# Altium PCB PCB1.PcbDoc
Units mil, origin at the board's own origin, x right, y up, seen from the top; angles counter-clockwise.
Board outline 3500 x 2000 mil, 2 copper layers (Top Layer, Bottom Layer), stack 61.756 mil thick; 37 components, 23 nets, 95 pads, 0 vias.
Unrouted connection lines stored in the file: 70.
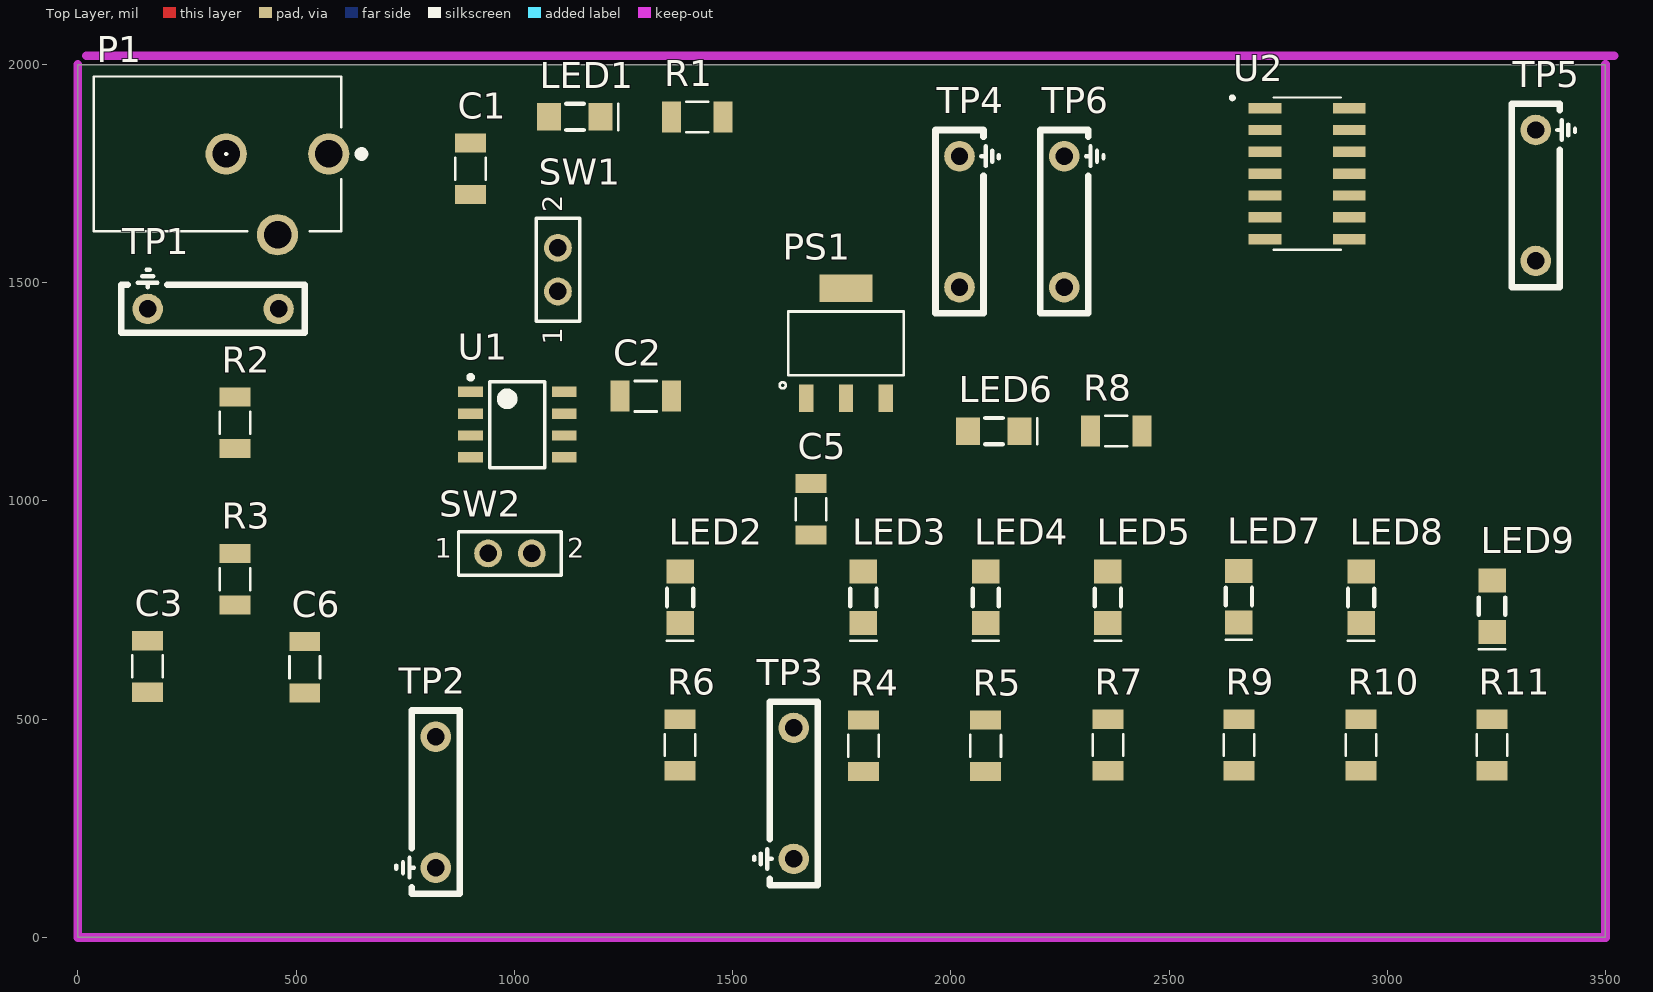
[diagram p0: Top Layer view]
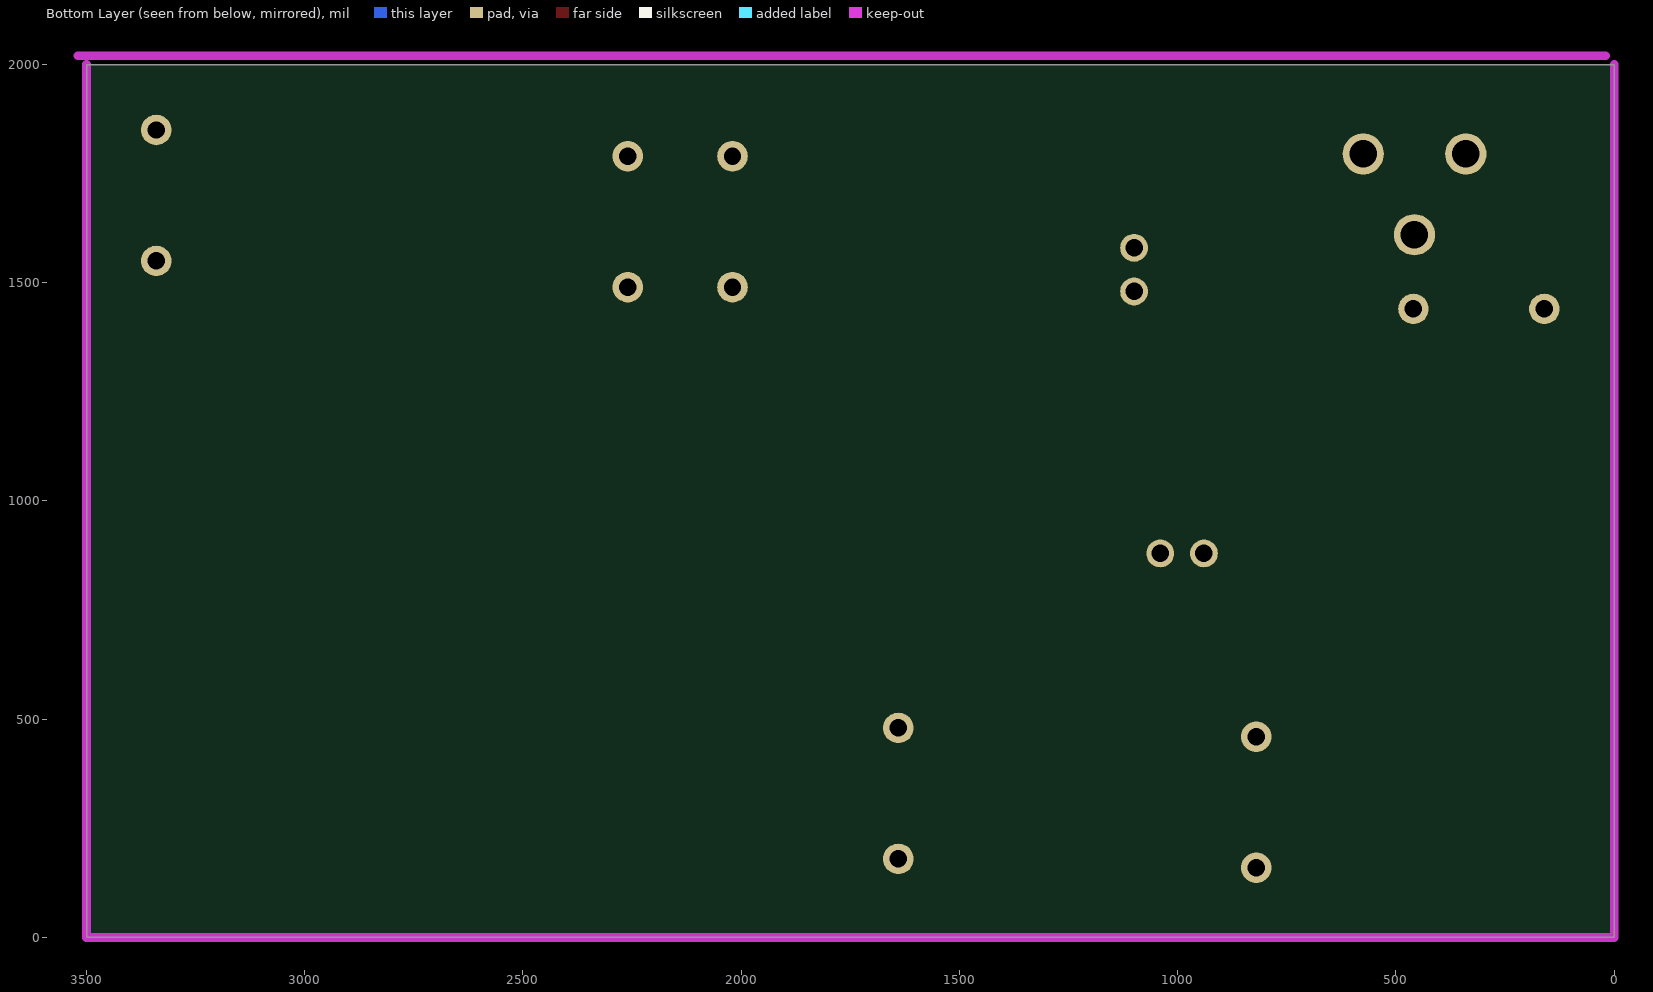
[diagram p1: Bottom Layer view, seen from below]

## Layer stack, top to bottom
Top Solder: solder mask 1, SM-001, Dk 4
Top Layer: signal copper 1.378
Dielectric 1: core 59, Core-043, Dk 4.3
Bottom Layer: signal copper 1.378
Bottom Solder: solder mask 1, SM-001, Dk 4

## Board outline
0,0 3500,0 3500,2000 0,2000

## Design rules (kind name [scope] priority, off if disabled: settings)
Clearance [All] p1: gap=10 ignorepadtopadclearanceinfootprint=FALSE except(0: Arc-Hole Track-Hole SMDPad-Hole THPad-Hole Via-Hole Fill-Hole Poly-Hole Region-Hole Text-Hole)
PlaneClearance [All] p1: clearance=10
PlaneConnect [All] p1: planeconnectstyle=Direct reliefexpansion=20 reliefentries=4 reliefconductorwidth=10 reliefairgap=10
PolygonConnect [All] p1: connectstyle=Direct reliefconductorwidth=10 reliefentries=4 polygonreliefangle="90 Angle" airgapwidth=10
RoomDefinition Sheet1 [InComponentClass('Sheet1')] p1: confinementstyle=ConfineIn formatcopy=TRUE lockcomponents=FALSE outline -570,2013 4940,2013 4940,2763 -570,2763
RoutingVias [All] p1: holewidth=13 width=25 viastyle="Through Hole" minholewidth=13 minwidth=25 maxholewidth=60 maxwidth=80
SolderMaskExpansion [All] p1: expansion=4 istentingtop=FALSE
UnRoutedNet [All] p1: checkbadconnections=TRUE
Width "Schematic Width Constraint_2" [InNet('LDO_3.3V')] p1: maxlimit=100 minlimit=10 preferedwidth=20 minimp=50.000000 maximp=50.000000 favimp=50.000000
Width "Schematic Width Constraint_1" [InNet('+5')] p2: maxlimit=100 minlimit=10 preferedwidth=20 minimp=50.000000 maximp=50.000000 favimp=50.000000
Width "Schematic Width Constraint" [InNet('555_5v')] p3: maxlimit=100 minlimit=10 preferedwidth=20 minimp=50.000000 maximp=50.000000 favimp=50.000000
Width [All] p4: maxlimit=100 minlimit=6 preferedwidth=6 minimp=50.000000 maximp=50.000000 favimp=50.000000
27 further rules are at their usual default settings.

## Components (designator, comment, footprint, x,y, rotation, side; value= is the part's Value field where it differs from the comment)
C1 "22pF" 1206_Passive 900,1820 r270 top
C2 "22pF" 1206_Passive 1242,1240 r0 top
C3 "50nF" 1206_Passive 160,562 r90 top
C5 "22uF" 1206_Passive 1680,922 r90 top
C6 "50nF" 1206_Passive 520,560 r90 top
LED1 "LTST-C150CKT" LED 1198,1880 r270 top value=Red
LED2 "LTST-C150CKT" LED 1380,720 r180 top value=Red
LED3 "LTST-C150CKT" LED 1800,720 r180 top value=Red
LED4 "LTST-C150CKT" LED 2080,720 r180 top value=Red
LED5 "LTST-C150CKT" LED 2360,720 r180 top value=Red
LED6 "LTST-C150CKT" LED 2158,1160 r270 top value=Red
LED7 "LTST-C150CKT" LED 2660,722 r180 top value=Red
LED8 "LTST-C150CKT" LED 2940,720 r180 top value=Red
LED9 "LTST-C150CKT" LED 3240,700 r180 top value=Red
P1 "Power Jack" Power_Jack 575,1795 r180 top value="CONN PWR JACK 2X5.5MM SOLDER"
PS1 "AZ1117CH-3.3TRG1" LDO 1760,1360 r180 top value="IC REG LINEAR 3.3V 800MA SOT223"
R1 "1k" 1206_Passive 1478,1880 r180 top value="1K Ohm"
R2 "10k" 1206_Passive 360,1120 r90 top value=10KOhm
R3 "10k" 1206_Passive 360,762 r90 top value=10KOhm
R4 "1k" 1206_Passive 1800,380 r90 top value="1K Ohm"
R5 "300" 1206_Passive 2080,380 r90 top value=300Ohm
R6 "1M" 1206_Passive 1380,382 r90 top value="10k Ohm"
R7 "1M" 1206_Passive 2360,382 r90 top value=50
R8 "1k" 1206_Passive 2438,1160 r180 top value="1K Ohm"
R9 "50" 1206_Passive 2660,382 r90 top value=50Ohm
R10 "50" 1206_Passive 2940,382 r90 top value=50Ohm
R11 "50" 1206_Passive 3240,382 r90 top value=50Ohm
SW1 "SW_2Pin_100mil_Switch" 2Pin-Header-Conn 1100,1480 r90 top
SW2 "SW_LED_Off/On" 2Pin-Header-Conn 940,880 r0 top
TP1 "TP_5V" TP10x_Probe 310,1440 r180 top
TP2 "TP_555_Output" TP10x_Probe 820,310 r270 top
TP3 "TP_LED_current" TP10x_Probe 1640,330 r270 top
TP4 "TP_Quiet_Low" TP10x_Probe 2020,1640 r90 top
TP5 "TP_Quiet_High" TP10x_Probe 3340,1700 r90 top
TP6 "TP_Trigger" TP10x_Probe 2260,1640 r90 top
U1 "U_555_Fast" TS555IDTTR 900,1250 r0 top
U2 "Hex Inverter" HEX_74LVT14D 2816.65,1750 r0 top

## Footprints (in the part's own frame and the unit in brackets; to place one, negate y for a bottom-side part, rotate by r counter-clockwise, add the part's x,y. Pads: shape width x height; smd on the part's side, far side on the other; paste and mask are expansions set on the pad)
2Pin-Header-Conn [mm]
  round 1.62 hole 1.02: 1(0,0) 2(2.54,0)
  silkscreen extent -1.72,-1.27 4.26,1.26
1206_Passive [mil]
  rect 44x71 smd: 1(0,0) 2(118,0)
  silkscreen extent 34,-35 84,35
HEX_74LVT14D [mm]
  rect 1.9x0.6 smd: 1(-2.455,3.81) 2(-2.455,2.54) 3(-2.455,1.27) 4(-2.455,0) 5(-2.455,-1.27) 6(-2.455,-2.54) 7(-2.455,-3.81) 8(2.455,-3.81) 9(2.455,-2.54) 10(2.455,-1.27) 11(2.455,0) 12(2.455,1.27) 13(2.455,2.54) 14(2.455,3.81)
  silkscreen extent -4.45,-4.43 1.95,4.51
LDO [mil]
  rect 33x63 smd: 1(91,124.94) 2(0,124.94) 3(-91,124.94)
  rect 122x63 smd: 4(0,-127.06)
  silkscreen extent -132,-74 152,102
LED [mil]
  rect 63x55 smd: 1(0,0) 2(0,-118)
  silkscreen extent -30,-79 30,40
Power_Jack [mm]
  round 2.4 hole 1.6: 1(0,0) 2(5.969,0) 3(2.977,4.7)
  silkscreen extent -2.1,-4.5 13.68,4.5
TP10x_Probe [mil] "Small Probs footprint"
  round 70 hole 40: 1(-150,0) 2(150,0)
  silkscreen extent -210,-90 210,55
TS555IDTTR [mm] "IC OSC Single Timer 2.7MHz 8SOIC"
  rect 1.45x0.6 smd: 1(0,0) 2(0,-1.27) 3(0,-2.54) 4(0,-3.81) 5(5.45,-3.81) 6(5.45,-2.54) 7(5.45,-1.27) 8(5.45,0)
  silkscreen extent -0.12,-4.41 4.33,0.97

## Part data
C1 C2: library part C_22pF_1206, "22pF ±5% 16V Ceramic Capacitor C0G, NP0 1206 (3216 Metric)", Digikey Link=https://www.digikey.com/product-detail/en/885012008011/732-7867-1-ND/5454494/?itemSeq=304982362, Digikey Part=732-7867-1-ND
C3 C6: library part C_50nF_1206, "50nF ±5% 16V Ceramic Capacitor C0G, NP0 1206 (3216 Metric)", Digikey Link=https://www.digikey.com/product-detail/en/885012008011/732-7867-1-ND/5454494/?itemSeq=304982362, Digikey Part=732-7867-1-ND
C5: library part C_22uF_1206, "22µF ±20% 16V Ceramic Capacitor X5R 1206 (3216 Metric)", Digikey Link=https://www.digikey.com/product-detail/en/CL31A226MOCLNNC/1276-2728-1-ND/3890814/?itemSeq=304982363, Digikey Part=1276-2728-1-ND
LED1 LED2 LED3 LED4 LED5 LED6 LED7 LED8 LED9: library part LED_RED_1206, "Red 638nm LED Indication - Discrete 1.8V 1206 (3216 Metric)", Digikey Link=https://www.digikey.com/product-detail/en/LTST-C150CKT/160-1167-1-ND/269239/?itemSeq=304982368, Digikey Part=160-1167-1-ND
P1: library part "P_Power Jack", "Power Barrel Connector Jack 2.10mm ID (0.083\"), 5.50mm OD (0.217\") Through Hole, Right Angle", Digikey Link=https://www.digikey.com/product-detail/en/PJ-102A/CP-102A-ND/275425/?itemSeq=304982367, Digikey Part=CP-102A-ND
PS1: library part PS_LDO_3v3, "Linear Voltage Regulator IC Positive Fixed 1 Output 1A SOT-223", Digikey Link=https://www.digikey.com/product-detail/en/AZ1117CH-3.3TRG1/AZ1117CH-3.3TRG1DICT-ND/4505206/?itemSeq=304982370, Digikey Part=AZ1117CH-3.3TRG1DICT-ND
R1 R4 R8: library part R_1K_1206, "1 kOhms ±1% 0.5W, 1/2W Chip Resistor 1206 (3216 Metric) Anti-Sulfur, Moisture Resistant Thin Film", Digikey Link=https://www.digikey.com/product-detail/en/RNCP1206FTD1K00/RNCP1206FTD1K00CT-ND/2240675/?itemSeq=304982373, Digikey Part=RNCP1206FTD1K00CT-ND
R2 R3: library part R_10KOhm_1206, "10 kOhms ±5% 0.25W, 1/4W Chip Resistor 1206 (3216 Metric) Automotive AEC-Q200 Thick Film", Digikey Link=https://www.digikey.com/product-detail/en/RMCF1206JT300R/RMCF1206JT300RCT-ND/1942776/?itemSeq=304982374, Digikey Part=RMCF1206JT300RCT-ND
R5: library part R_300Ohm_1206, "300 Ohms ±5% 0.25W, 1/4W Chip Resistor 1206 (3216 Metric) Automotive AEC-Q200 Thick Film", Digikey Link=https://www.digikey.com/product-detail/en/RMCF1206JT300R/RMCF1206JT300RCT-ND/1942776/?itemSeq=304982374, Digikey Part=RMCF1206JT300RCT-ND
R6 R7: library part R_1M_1206, "1 MOhms ±5% 0.25W, 1/4W Chip Resistor 1206 (3216 Metric) Automotive AEC-Q200 Thick Film", Digikey Link=https://www.digikey.com/product-detail/en/RMCF1206JT1M00/RMCF1206JT1M00CT-ND/1942830/?itemSeq=304982358, Digikey Part="Number RMCF1206JT1M00CT-ND"
R9 R10 R11: library part R_50Ohm_1206, "50 Ohms ±5% 0.25W, 1/4W Chip Resistor 1206 (3216 Metric) Automotive AEC-Q200 Thick Film", Digikey Link=https://www.digikey.com/product-detail/en/RMCF1206JT300R/RMCF1206JT300RCT-ND/1942776/?itemSeq=304982374, Digikey Part=RMCF1206JT300RCT-ND
SW1: "2Pin Header"
SW2: library part SW_2Pin_100mil_Switch, "2Pin Header"
TP1 TP2 TP3 TP4 TP5 TP6: library part TP_10x_Probe, "Test Point 300 mil centers"
U1: "555 Type, Timer/Oscillator _Single_ IC 2.7MHz 8-SO", Package="SO-8 STMicroelectronics", Availability=Unavailable, DigiKey-Purchase-URL=https://snapeda.com/shop?store=DigiKey&id=1050007, MF=STMicroelectronics, MP=TS555IDTTR, Price=None, SnapEDA_Link=https://www.snapeda.com/parts/TS555IDTTR/STMicroelectronics/view-part/1050007/?ref=snap
U2: library part U_7414_LVTD_Hex, "Inverter IC 6 Channel Schmitt Trigger 14-SOIC", ComponentLink1Description="New link", Supplier 1=Digi-Key

## Nets (pads, with @x,y where several pads share a name; then routed paths per layer and width w, separated by ;. In a path a pad name is that pad's centre, name@x,y a point inside that pad or via, vN(x,y) a via of type N, cw(c..) or ccw(c..) an arc to the next point about the centre after c; other vN are vias at no path point)
555_5v: C2.2 PS1.3 R2.2 SW1.2 U1.4 U1.8
555_D: R2.1 R3.2 U1.7
555_output: SW2.1 TP2.1 U1.3 U2.3 U2.5 U2.9 U2.11
+5: C1.1 LED1.2 P1.1 SW1.1 TP1.1
GND: C1.2 C2.1 C3.1 C5.1 C6.1 P1.2 P1.3 PS1.1 R1.1 R4.1 R5.1 R6.1 R7.1 R8.1 R9.1 R10.1 R11.1 TP1.2 TP2.2 TP3.2 TP4.2 TP5.1 TP6.2 U1.1 U2.7 U2.13
LDO_3.3V: C5.2 LED6.2 PS1.2 U2.1 U2.14
NetC3_2: C3.2 C6.2 R3.1 U1.2 U1.6
NetLED1_1: LED1.1 R1.2
NetLED2_1: LED2.1 R6.2
NetLED2_2: LED2.2 LED3.2 LED4.2 LED5.2 SW2.2
NetLED3_1: LED3.1 R4.2 TP3.1
NetLED4_1: LED4.1 R5.2
NetLED5_1: LED5.1 R7.2
NetLED6_1: LED6.1 R8.2
NetLED7_1: LED7.1 R9.2
NetLED7_2: LED7.2 U2.6
NetLED8_1: LED8.1 R10.2
NetLED8_2: LED8.2 U2.8
NetLED9_1: LED9.1 R11.2
NetLED9_2: LED9.2 U2.10
NetTP4_1: TP4.1 U2.2
NetTP5_2: TP5.2 U2.12
NetTP6_1: TP6.1 U2.4
pads on no net: PS1.4 U1.5

## Keep-outs
Keep-Out Layer:
  lines w20: 0,0 0,2000 0,0 ; 0,0 3500,0 ; 0,0 3500,0 ; 3500,0 3500,2000 3500,0 ; 20,2020 3520,2020 20,2020

## Text inside footprints (layer, text, board x,y; h text height)
SW1: Top Overlay "2" at 1125,1661.14 h77.5 r90; Top Overlay "1" at 1125,1358.35 h77.5 r90; Mechanical 16 "2" at 1125,1661.14 h77.5 r90; Mechanical 16 "1" at 1125,1358.35 h77.5 r90
SW2: Top Overlay "2" at 1121.14,855 h77.5; Top Overlay "1" at 818.35,855 h77.5; Mechanical 16 "2" at 1121.14,855 h77.5; Mechanical 16 "1" at 818.35,855 h77.5